# Altium PCB BLDC-2020.PcbDoc (part 1 of 3)
Units mil, origin at the board's own origin, x right, y up, seen from the top; angles counter-clockwise.
Board outline 3000 x 7500 mil, 4 copper layers (Top Layer, GND, Power, Bottom Layer), stack 26.468 mil thick; 202 components, 138 nets, 710 pads, 30 vias.
Unrouted connection lines stored in the file: 399.
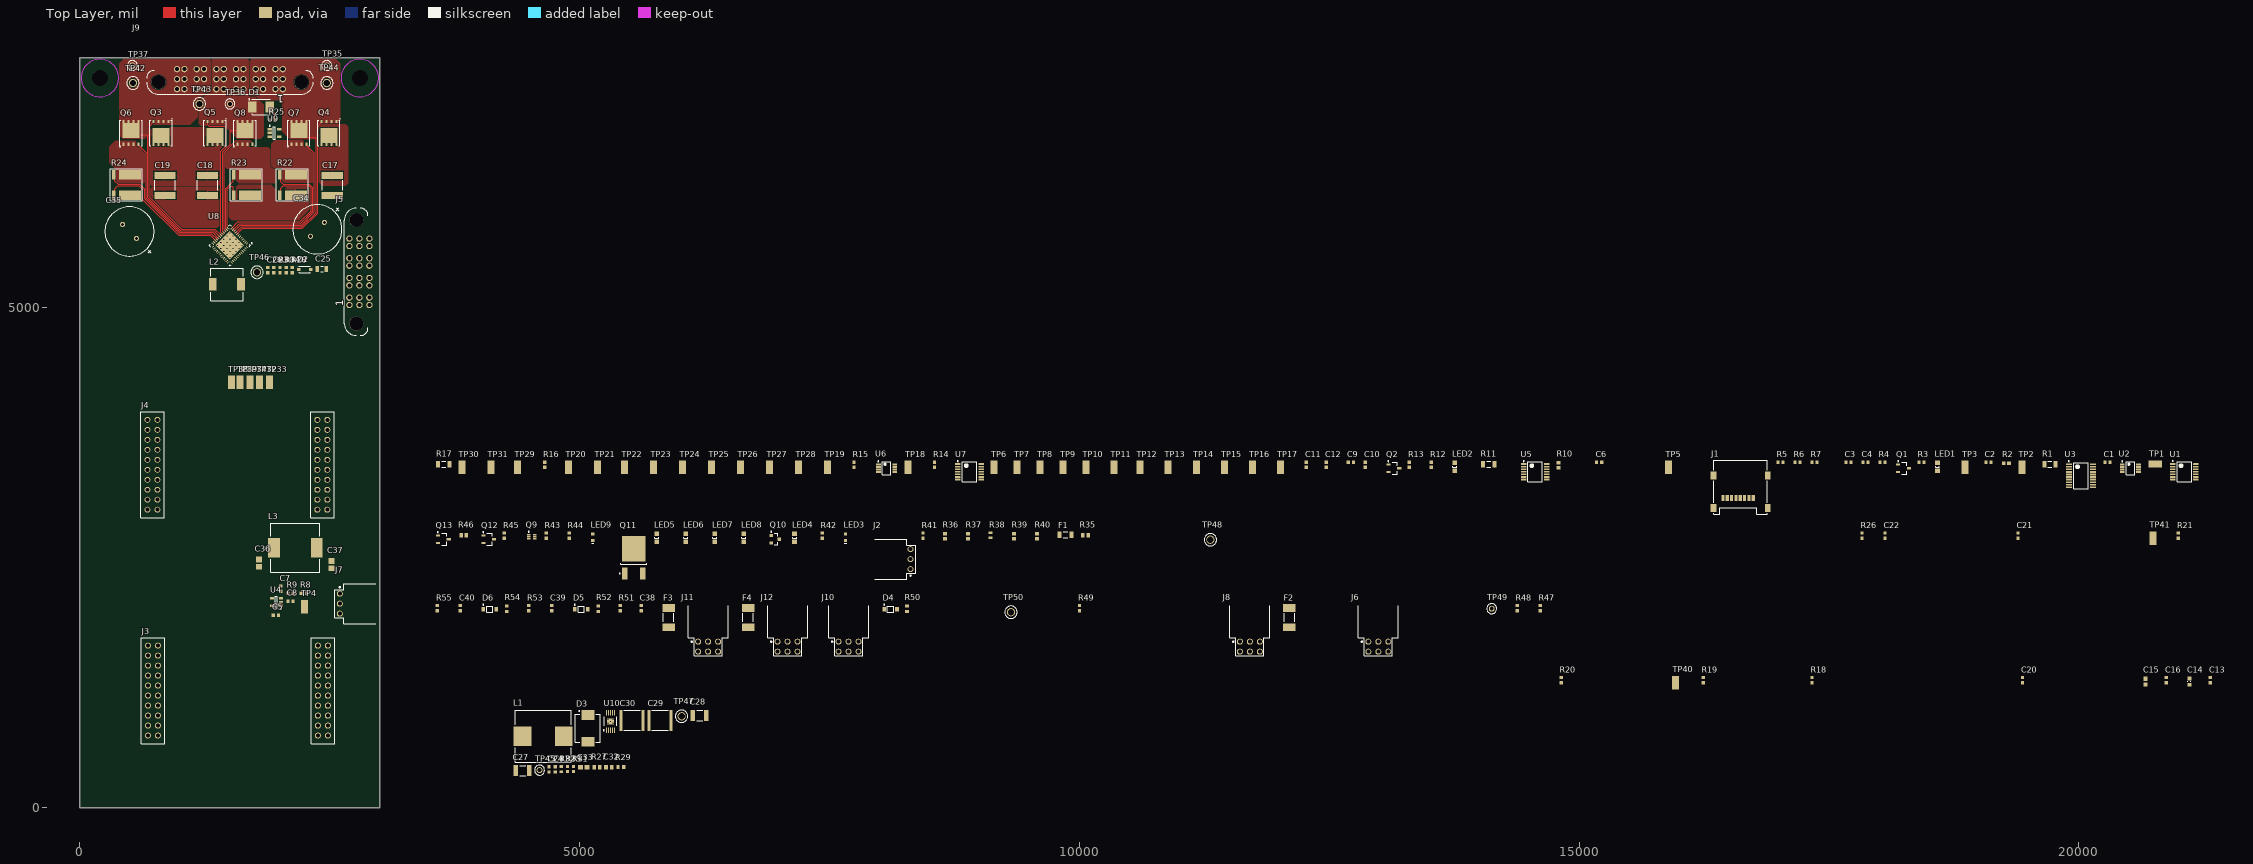
[diagram p0: Top Layer view]
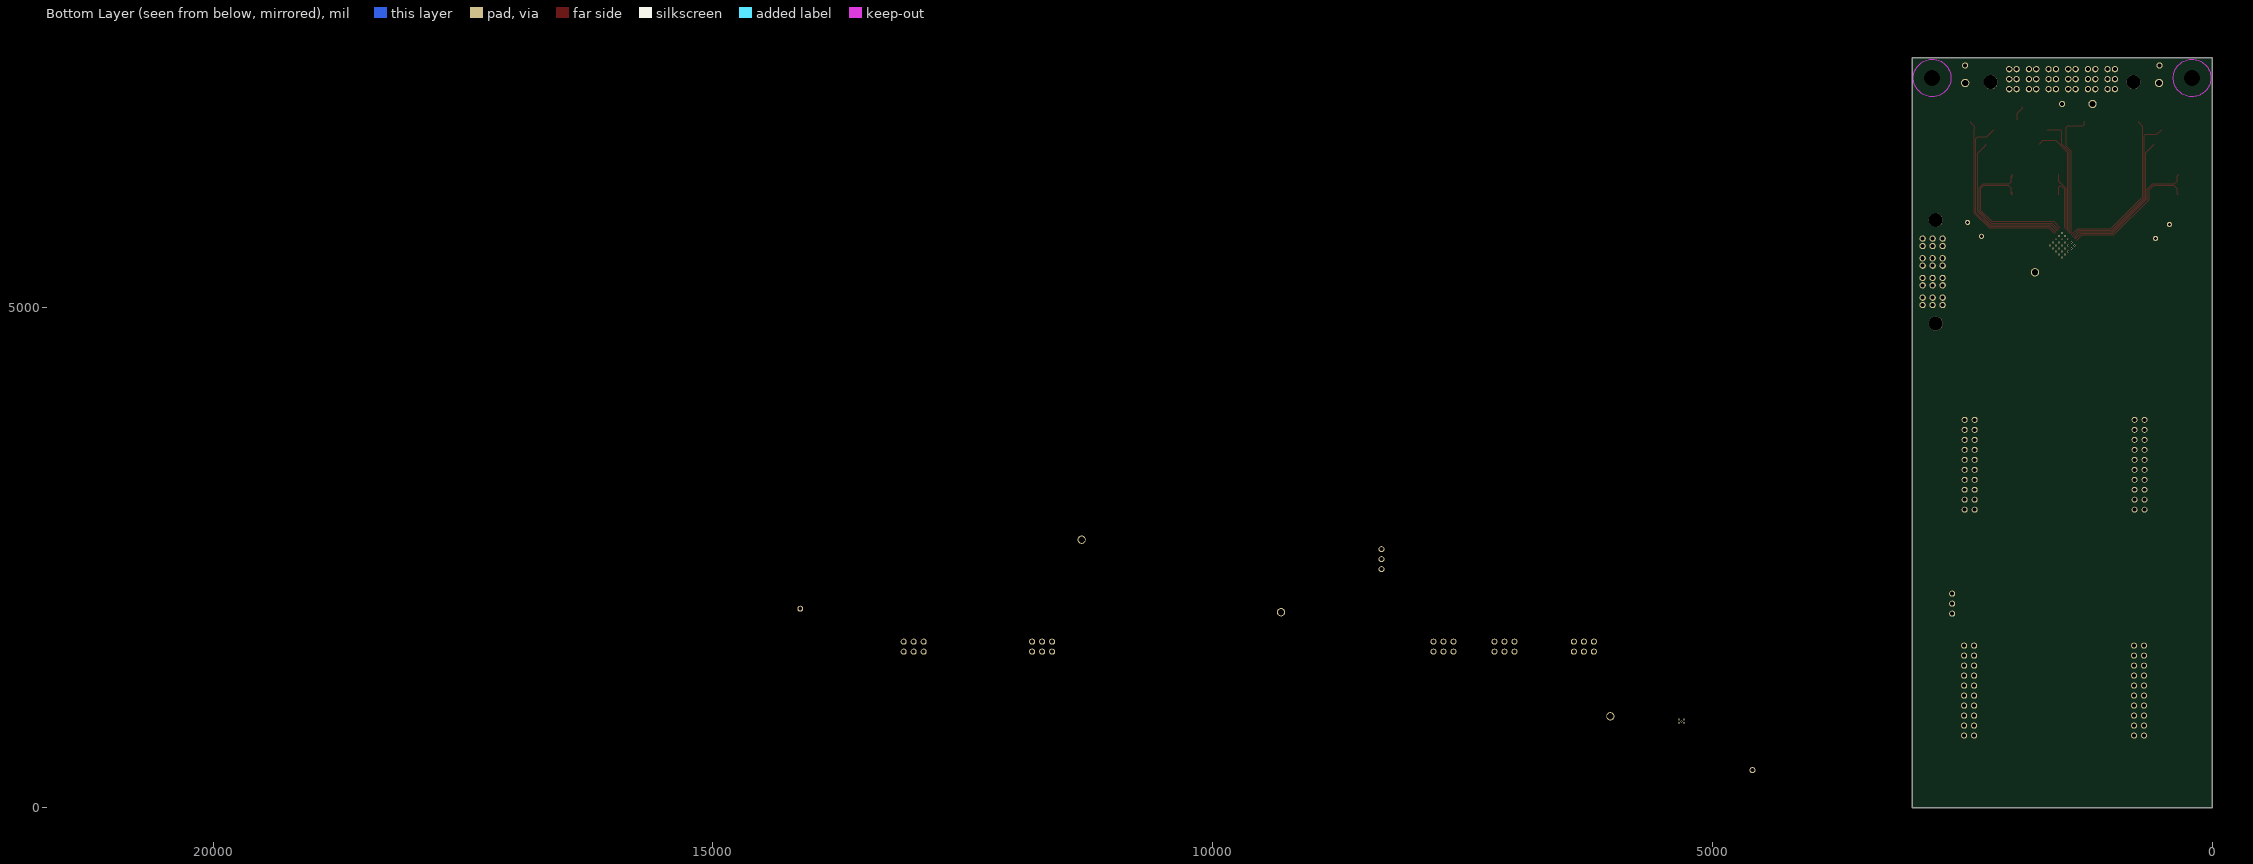
[diagram p1: Bottom Layer view, seen from below]
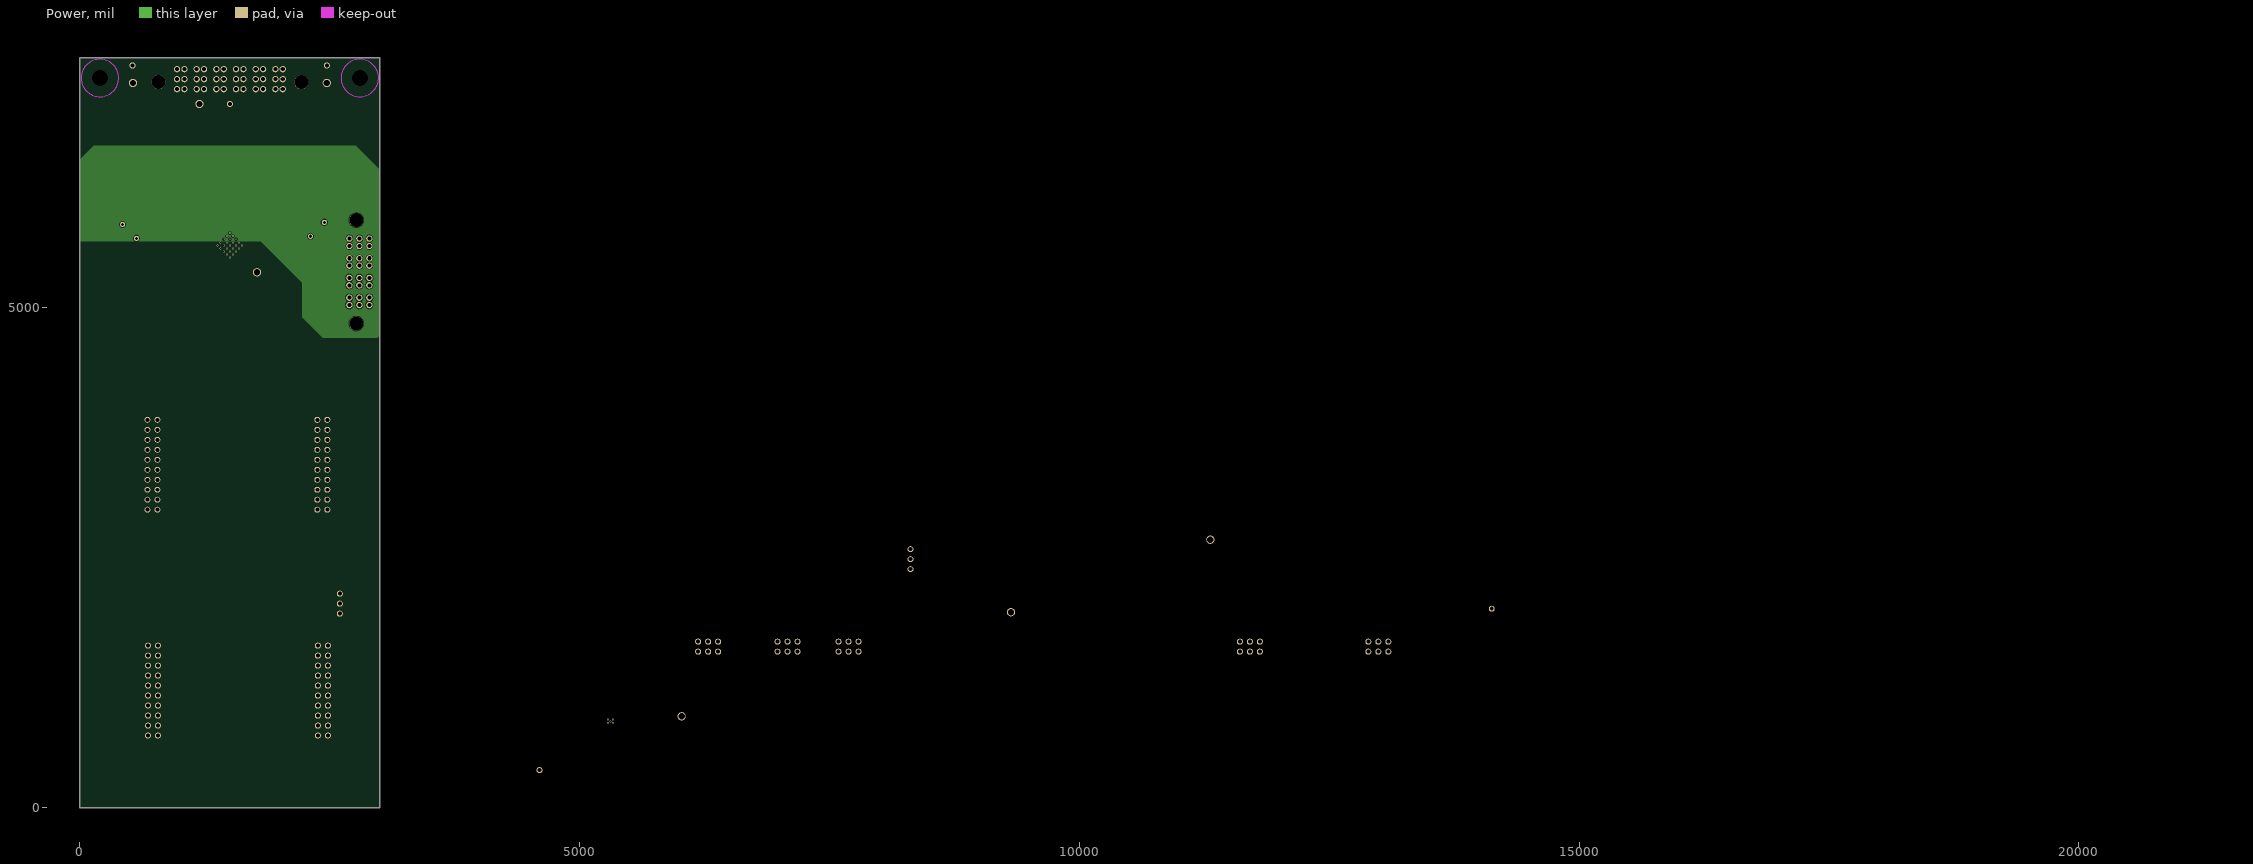
[diagram p2: Power]

## Layer stack, top to bottom
Top Solder: solder mask 0.4, Solder Resist, Dk 3.5
Top Layer: signal copper 2.7559
Dielectric 2: prepreg 2.8, PP-006, Dk 4.1
GND: signal copper 1.3779
Dielectric 1: dielectric 12.6, FR-4, Dk 4.8
Power: signal copper 1.3779
Dielectric 3: prepreg 2.8, PP-006, Dk 4.1
Bottom Layer: signal copper 2.7559
Bottom Solder: solder mask 0.4, Solder Resist, Dk 3.5

## Board outline
0,0 3000,0 3000,7500 0,7500

## Design rules (kind name [scope] priority, off if disabled: settings)
Clearance [All] p1: gap=6 ignorepadtopadclearanceinfootprint=FALSE except(10: Fill-Fill Fill-Poly Fill-Region Poly-Poly Poly-Region Region-Region)
DiffPairsRouting [All] p1: maxlimit=15 minlimit=6 mostfreqgap=10 toplayer_minwidth=6 toplayer_maxwidth=30 toplayer_prefwidth=15 midlayer1_minwidth=6 midlayer1_maxwidth=30 midlayer1_prefwidth=15 midlayer2_minwidth=6 midlayer2_maxwidth=30 midlayer2_prefwidth=15 bottomlayer_minwidth=6 bottomlayer_maxwidth=30 bottomlayer_prefwidth=15 maxuncoupledlength=250
HoleSize [All] p1: absolutevalues=TRUE maxlimit=100 minlimit=11 maxpercent=80.000 minpercent=20.000
PolygonConnect "Phase Connections" [InNetClass('PhaseNet')] p1: connectstyle=Direct reliefconductorwidth=10 reliefentries=4 polygonreliefangle="90 Angle" airgapwidth=10
PolygonConnect PolygonConnect_1 [All] p2: connectstyle=Relief reliefconductorwidth=10 reliefentries=4 polygonreliefangle="90 Angle" airgapwidth=10
RoomDefinition "5V Regulator" [InComponentClass('5V Regulator')] p1: confinementstyle=ConfineIn formatcopy=TRUE lockcomponents=FALSE outline 4325,0 6325,0 6325,1000 4325,1000
RoomDefinition "3.3V Regulator" [InComponentClass('3.3V Regulator')] p2: confinementstyle=ConfineIn formatcopy=TRUE lockcomponents=FALSE outline 495.48,5000 3000,5000 3000,6002.16 495.48,6002.16
RoomDefinition FETBridge [InComponentClass('FETBridge')] p3: confinementstyle=ConfineIn formatcopy=TRUE lockcomponents=FALSE outline 0,6000 3000,6000 3000,7500 0,7500
RoutingTopology [All] p1: topology=Daisy_Balanced
RoutingVias [All] p1: holewidth=28 width=50 viastyle="Through Hole" minholewidth=11 minwidth=23 maxholewidth=50 maxwidth=100
SolderMaskExpansion [All] p1: expansion=4
Width [All] p1: maxlimit=1000 minlimit=6 preferedwidth=10
27 further rules are at their usual default settings.

## Classes and differential pairs
net class PhaseNet: NetQ6_S NetQ7_S NetQ8_S PHASE_A PHASE_B PHASE_C
component class "5V Regulator": C24 C27 C28 C29 C30 C31 C32 C33 D3 L1 R27 R29 R31 R32 R33 TP45 TP47 U10
component class "3.3V Regulator": C23 C25 C26 D2 L2 R28 R30 R34 TP46
component class FETBridge: C17 C18 C19 D1 Q3 Q4 Q5 Q6 Q7 Q8 R22 R23 R24 R25 TP32 TP33 TP34 TP35 TP36 TP37 TP38 TP39 TP42 TP43 TP44
differential pair class SC: SC
differential pair class SB: SB
differential pair class SA: SA
component class "MCU and Digital Interfaces": C1 C2 C3 C4 C5 C6 C7 C8 C9 C10 C11 C12 J1 LED1 LED2 Q1 Q2 R1 R2 R3 R4 R5 R6 R7 R8 R9 R10 R11 R12 R13 R14 R15 R16 R17 TP1 TP2 TP3 TP4 TP5 TP6 TP7 TP8 TP9 TP10 TP11 TP12 TP13 TP14 TP15 TP16 TP17 TP18 TP19 TP20 TP21 TP22 TP23 TP24 TP25 TP26 TP27 TP28 TP29 TP30 TP31 U1 U2 U3 U4 U5 U6 U7
component class "Gate Driver and Power Section": C13 C14 C15 C16 C17 C18 C19 C20 C21 C22 C23 C24 C25 C26 C27 C28 C29 C30 C31 C32 C33 D1 D2 D3 F1 J2 L1 L2 LED3 LED4 LED5 LED6 LED7 LED8 LED9 Q3 Q4 Q5 Q6 Q7 Q8 Q9 Q10 Q11 Q12 Q13 R18 R19 R20 R21 R22 R23 R24 R25 R26 R27 R28 R29 R30 R31 R32 R33 R34 R35 R36 R37 R38 R39 R40 R41 R42 R43 R44 R45 R46 TP32 TP33 TP34 TP35 TP36 TP37 TP38 TP39 TP40 TP41 TP42 TP43 TP44 TP45 TP46 TP47 TP48 U9 U10
component class "Connectors and Inputs": C34 C35 C36 C37 C38 C39 C40 D4 D5 D6 F2 F3 F4 J3 J4 J5 J6 J7 J8 J9 J10 J11 J12 L3 R47 R48 R49 R50 R51 R52 R53 R54 R55 TP49 TP50
differential pair SC: +SC_P -SC_N
differential pair SB: +SB_P -SB_N
differential pair SA: +SA_P -SA_N

## Components (designator, comment, footprint, x,y, rotation, side; value= is the part's Value field where it differs from the comment)
C1 "0.1uF" CAPC1608X05L 20285,3455 r0 top
C2 "0.1uF" CAPC1608X05L 19095,3455 r0 top
C3 "0.1uF" CAPC1608X05L 17695,3455 r0 top
C4 "0.1uF" CAPC1608X05L 17865,3455 r0 top
C5 "0.1uF" CAPC1608X05L 1959.41,1925 r0 top
C6 "0.1uF" CAPC1608X05L 15200,3455 r0 top
C7 "3.9nF" CAPC1608X05L 2010,2190.59 r270 top
C8 "39nF" CAPC1608X05L 2105.59,2065 r180 top
C9 "0.1uF" CAPC1608X05L 12715,3455 r0 top
C10 "0.1uF" CAPC1608X05L 12860,3430 r90 top
C11 "0.1uF" CAPC1608X05L 12270,3430 r90 top
C12 "0.1uF" CAPC1608X05L 12470,3430 r90 top
C13 "1uF" CAPC1608X05L 21315,1275 r90 top
C14 "47nF" CAPC0603(1608)100_N 21105,1260 r90 top
C15 "10uF" CAPC1608X90X35NL15T15 20665,1260 r90 top
C16 "0.1uF" CAPC1608X05L 20875,1275 r90 top
C17 "10uF" CAPC5750X279X64NL40T39 2525,6225 r90 top
C18 "10uF" CAPC5750X279X64NL40T39 1275,6225 r90 top
C19 "10uF" CAPC5750X279X64NL40T39 850,6225 r90 top
C20 "1uF" CAPC1608X05L 19435,1275 r90 top
C21 "0.1uF" CAPC1608X05L 19390,2720 r90 top
C22 "0.1uF" CAPC1608X05L 18060,2720 r90 top
C23 "0.1uF" CAPC1608X05L 1940.27,5376.82 r90 top
C24 "0.1uF" CAPC1608X05L 4692.71,383.17 r90 top
C25 "4.7uF" CAPC2113X15N 2419.84,5388.63 r0 top
C26 "10uF" CAPC1608X05L 1878.8,5376.82 r90 top
C27 "100uF" MURA-1210_H_2.7_M 4429.55,369.39 r0 top
C28 "100uF" MURA-1210_H_2.7_M 6200.32,920.88 r0 top
C29 "10uF" TDK-C5750-2_L 5803.11,871.67 r0 top
C30 "10uF" TDK-C5750-2_L 5523.14,871.67 r0 top
C31 "0.1uF" CAPC1608X05L 4754.17,383.17 r90 top
C32 "4700pf" CAPC1608X90X35ML10T15 5291.27,403.83 r0 top
C33 "270pf" CAPC1608X90X35ML15T15 5041.37,402.85 r0 top
C34 "390uF" EGPD800ELL391MK25H 2445,5855 r225 top
C35 "390uF" EGPD800ELL391MK25H 565,5695 r135 top
C36 "22uF" CAPC2013X145X50ML20T25 1790,2445 r90 top
C37 "22uF" CAPC2013X145X50ML20T25 2515,2430 r90 top
C38 "47nF" CAPC1608X05L 5615,1995 r90 top
C39 "47nF" CAPC1608X05L 4720,1995 r90 top
C40 "47nF" CAPC1608X05L 3805,1995 r90 top
D1 "1SMB5936BT3G" ONSC-SMB-2-403A-03_H_V 1812.01,7010 r0 top
D2 "PMEG6010CEH,115" SODFL350X120-2N 2249.12,5384.76 r0 top
D3 "B3100-13-F" DIOD-SMC-2_V 5081.5,792.93 r90 top
D4 "MMSZ5226BT1G" ONSC-SOD-123-2-425-04_V 8110,1985 r0 top
D5 "MMSZ5226BT1G" ONSC-SOD-123-2-425-04_V 5015,1985 r0 top
D6 "MMSZ5226BT1G" ONSC-SOD-123-2-425-04_V 4100,1985 r0 top
F1 "1.5A" TECO-NANOSMDC150F-2_V 9860,2730 r0 top
F2 "0451.500MRL" LFUS-45X_V 12100,1900 r90 top
F3 "0451.500MRL" LFUS-45X_V 5890,1900 r90 top
F4 "0451.500MRL" LFUS-45X_V 6685,1900 r90 top
J1 "693072010801" 693072010801 16615,3205 r0 top
J2 "IPL1-103-01-L-S-RA-K" IPL1-103-01-XXX-S-RA 7930,2485 r90 top
J3 "LuanchPad 40 Pin" "TI LuanchPad" 1580,1170 r180 top
J4 "LuanchPad 40 Pin" "TI LuanchPad" 1575,3430 r180 top
J5 "MPT-04-01-01-L-RA-SD" *MPT-04-01-XX-X-RA-SD 3007.2,5360.43 r90 top
J6 "IPL1-103-01-XXX-D-RA" IPL1-103-01-XXX-D-RA 12990,2040 r0 top
J7 "IPL1-103-01-L-S-RA-K" IPL1-103-01-XXX-S-RA 2980,2040 r270 top
J8 "IPL1-103-01-XXX-D-RA" IPL1-103-01-XXX-D-RA 11705,2040 r0 top
J9 "MPT-06-01-01-L-RA-SD" *MPT-06-01-XX-X-RA-SD 1500,7500 r180 top locked
J10 "IPL1-103-01-XXX-D-RA" IPL1-103-01-XXX-D-RA 7690,2040 r0 top
J11 "IPL1-103-01-XXX-D-RA" IPL1-103-01-XXX-D-RA 6285,2040 r0 top
J12 "IPL1-103-01-XXX-D-RA" IPL1-103-01-XXX-D-RA 7080,2040 r0 top
L1 "22uH" WE-HCI-1365 4634.28,714.25 r0 top
L2 "33uH" INDP8080X46L 1470,5235 r0 top
L3 "120uH" INDP125125X60N 2155,2600 r0 top
LED1 "150080GS75000" 0805_A 18585,3410 r90 top
LED2 "150080GS75000" 0805_A 13755,3410 r90 top
LED3 "150060VS75000" 0603_A 7660,2705 r90 top
LED4 "150080GS75000" 0805_A 7150,2700 r90 top
LED5 "150080GS75000" 0805_A 5770,2700 r90 top
LED6 "150080GS75000" 0805_A 6060,2700 r90 top
LED7 "150080GS75000" 0805_A 6350,2700 r90 top
LED8 "150080GS75000" 0805_A 6640,2700 r90 top
LED9 "150060VS75000" 0603_A 5130,2705 r90 top
Q1 "DMN1019USN-7" SOT95P285X140-3N 18245,3395 r0 top
Q2 "DMN1019USN-7" SOT95P285X140-3N 13145,3395 r0 top
Q3 "BSC027N06LS5ATMA1" PG-TDSON-8-7 810,6750 r270 top
Q4 "BSC027N06LS5ATMA1" PG-TDSON-8-7 2490,6750 r270 top
Q5 "BSC027N06LS5ATMA1" PG-TDSON-8-7 1350,6750 r270 top
Q6 "BSC027N06LS5ATMA1" PG-TDSON-8-7 510,6750 r90 top
Q7 "BSC027N06LS5ATMA1" PG-TDSON-8-7 2190,6750 r90 top
Q8 "BSC027N06LS5ATMA1" PG-TDSON-8-7 1650,6750 r90 top
Q9 "NX3008CBKV,115" NXP-SOT666_M 4520,2710 r0 top
Q10 "NTR4101PT1G" ONSC-SOT-23-3-318-08_V 6955,2685 r0 top
Q11 "FQD9N25TM_F080" DPAK229P991X239-3N 5540,2460 r90 top
Q12 "DMN1019USN-7" SOT95P285X140-3N 4090,2685 r0 top
Q13 "DMN1019USN-7" SOT95P285X140-3N 3635,2685 r0 top
R1 "0" RESC3116X65X40NL10T20 19710,3435 r0 top
R2 "91" RESC1608X50X30NL20T20 19275,3445 r0 top
R3 "100" CAPC1608X05L 18425,3455 r0 top
R4 "10k" CAPC1608X05L 18035,3455 r0 top
R5 "10k" CAPC1608X05L 17015,3455 r0 top
R6 "100k" CAPC1608X05L 17185,3455 r0 top
R7 "100k" CAPC1608X05L 17355,3455 r0 top
R8 "19.1K" CAPC1608X05L 2240,2145 r180 top
R9 "536k" CAPC1608X05L 2105,2145 r180 top
R10 "91" RESC1608X50X30NL20T20 14795,3425 r90 top
R11 "0" RESC3116X65X40NL10T20 14095,3435 r0 top
R12 "10k" CAPC1608X05L 13520,3430 r90 top
R13 "100" CAPC1608X05L 13300,3430 r90 top
R14 "10k" CAPC1608X05L 8550,3430 r90 top
R15 "10k" CAPC1608X05L 7745,3430 r90 top
R16 "10k" CAPC1608X05L 4650,3430 r90 top
R17 "0" RESC3116X65X40NL10T20 3640,3435 r0 top
R18 "10k" CAPC1608X05L 17330,1275 r90 top
R19 "10k" CAPC1608X05L 16240,1275 r90 top
R20 "10k" CAPC1608X05L 14820,1275 r90 top
R21 "10k" CAPC1608X05L 20995,2720 r90 top
R22 "2m" WSL27262L000FEB 2160,6230 r180 top
R23 "2m" WSL27262L000FEB 1700,6230 r180 top
R24 "2m" WSL27262L000FEB 500,6230 r180 top
R25 "470" CAPC1608X05L 1925,6880 r180 top
R26 "10k" CAPC1608X05L 17830,2720 r90 top
R27 "53.6k" RESC1609X50X30ML10T20 5171.73,403.83 r0 top
R28 "100k" CAPC1608X05L 2124.66,5376.82 r90 top
R29 "10K" RESC1608X55X25ML10T15 5411.79,404.82 r0 top
R30 "28k" CAPC1608X05L 2001.73,5376.82 r90 top
R31 "412k" RESC1608X55X30LL15T15 4938.57,386.12 r90 top
R32 "10k" RESC1609X55X30LL15T15 4815.64,384.15 r90 top
R33 "12.7k" RESC1608X55X30LL15T15 4877.1,386.12 r90 top
R34 "8.45k" CAPC1608X05L 2063.2,5376.82 r90 top
R35 "41" RESC1609X50X30ML10T20 10060,2725 r0 top
R36 "91" RESC1608X50X30NL20T20 8655,2715 r90 top
R37 "91" RESC1608X50X30NL20T20 8885,2715 r90 top
R38 "430" RESC1608X55X30LL20T10 9110,2725 r90 top
R39 "91" RESC1608X50X30NL20T20 9345,2715 r90 top
R40 "91" RESC1608X50X30NL20T20 9575,2715 r90 top
R41 "100" CAPC1608X05L 8435,2720 r90 top
R42 "10k" CAPC1608X05L 7425,2720 r90 top
R43 "100" CAPC1608X05L 4665,2720 r90 top
R44 "100" CAPC1608X05L 4895,2720 r90 top
R45 "100" CAPC1608X05L 4245,2720 r90 top
R46 "41" RESC1609X50X30ML10T20 3840,2725 r0 top
R47 "10k" CAPC1608X05L 14610,1995 r90 top
R48 "10k" CAPC1608X05L 14380,1995 r90 top
R49 "28k" CAPC1608X05L 10000,1995 r90 top
R50 "97.6k" RESC1608X55X30NL15T15 8275,1990 r90 top
R51 "4.99K" CAPC1608X05L 5405,1995 r90 top
R52 "97.6k" RESC1608X55X30NL15T15 5185,1990 r90 top
R53 "4.99K" CAPC1608X05L 4490,1995 r90 top
R54 "97.6k" RESC1608X55X30NL15T15 4270,1990 r90 top
R55 "4.99K" CAPC1608X05L 3575,1995 r90 top
TP1 "5015" KSTN-5015_V 20765,3440 r0 top
TP2 "5015" KSTN-5015_V 19430,3405 r90 top
TP3 "5015" KSTN-5015_V 18860,3405 r90 top
TP4 "5015" KSTN-5015_V 2245,2010 r270 top
TP5 "5015" KSTN-5015_V 15895,3405 r90 top
TP6 "5015" KSTN-5015_V 9145,3405 r90 top
TP7 "5015" KSTN-5015_V 9375,3405 r90 top
TP8 "5015" KSTN-5015_V 9605,3405 r90 top
TP9 "5015" KSTN-5015_V 9835,3405 r90 top
TP10 "5015" KSTN-5015_V 10065,3405 r90 top
TP11 "5015" KSTN-5015_V 10345,3405 r90 top
TP12 "5015" KSTN-5015_V 10605,3405 r90 top
TP13 "5015" KSTN-5015_V 10885,3405 r90 top
TP14 "5015" KSTN-5015_V 11170,3405 r90 top
TP15 "5015" KSTN-5015_V 11450,3405 r90 top
TP16 "5015" KSTN-5015_V 11730,3405 r90 top
TP17 "5015" KSTN-5015_V 12010,3405 r90 top
TP18 "5015" KSTN-5015_V 8285,3405 r90 top
TP19 "5015" KSTN-5015_V 7480,3405 r90 top
TP20 "5015" KSTN-5015_V 4890,3405 r90 top
TP21 "5015" KSTN-5015_V 5180,3405 r90 top
TP22 "5015" KSTN-5015_V 5450,3405 r90 top
TP23 "5015" KSTN-5015_V 5740,3405 r90 top
TP24 "5015" KSTN-5015_V 6030,3405 r90 top
TP25 "5015" KSTN-5015_V 6320,3405 r90 top
TP26 "5015" KSTN-5015_V 6610,3405 r90 top
TP27 "5015" KSTN-5015_V 6900,3405 r90 top
TP28 "5015" KSTN-5015_V 7190,3405 r90 top
TP29 "5015" KSTN-5015_V 4380,3405 r90 top
TP30 "5015" KSTN-5015_V 3820,3405 r90 top
TP31 "5015" KSTN-5015_V 4110,3405 r90 top
TP32 "5015" KSTN-5015_V 1798.35,4254.54 r90 top
TP33 "5015" KSTN-5015_V 1896.42,4254.54 r90 top
TP34 "5015" KSTN-5015_V 1700.27,4254.54 r90 top
TP35 "5002" KSTN-5002 2470,7425 r90 top
TP36 "5002" KSTN-5002 1500,7040 r90 top
TP37 "5002" KSTN-5002 525,7425 r90 top
TP38 "5015" KSTN-5015_V 1515,4255 r90 top
TP39 "5015" KSTN-5015_V 1602.19,4254.54 r90 top
TP40 "5015" KSTN-5015_V 15965,1250 r90 top
TP41 "5015" KSTN-5015_V 20740,2695 r90 top
TP42 "5011" KSTN-5011_V 530,7250 r0 top
TP43 "5011" KSTN-5011_V 1195,7040 r0 top
TP44 "5011" KSTN-5011_V 2470,7250 r0 top
TP45 "5004" KSTN-5004 4598.04,374.57 r90 top
TP46 "5013" KSTN-5013_V 1771.73,5355.82 r0 top
TP47 "5011" KSTN-5011_V 6019.43,913.66 r0 top
TP48 "5011" KSTN-5011_V 11310,2680 r0 top
TP49 "5003" KSTN-5003 14125,1990 r90 top
TP50 "5011" KSTN-5011_V 9315,1955 r0 top
U1 "SN74LV4T125PWR" PW0014A_N 21055,3360 r0 top
U2 "SN74LVC3G17DCTR" DCT0008A_M 20515,3395 r0 top
U3 "TXS0108EPWR" PW0020A_M 20020,3320 r0 top
U4 "LTC6240CS5" LT-S5-5-TSOT-23_L 1965.28,2057.4 r180 top
U5 "TXB0104PWR" PW0014A_N 14560,3360 r0 top
U6 "SN74LVC3G17DCTR" DCT0008A_M 8070,3395 r0 top
U7 "SN74LV4T125PWR" PW0014A_N 8900,3360 r0 top
U8 "DRV8323RSRGZR" QFN50P700X700X100_HS-49N 1500,5625 r225 top
U9 "TC77-5.0MCTTR" SOT-23-CT5_N 1945,6750 r0 top
U10 "TPS54260DGQR" DGQ0010D_N 5308.2,861.83 r90 top

## Footprints (in the part's own frame and the unit in brackets; to place one, negate y for a bottom-side part, rotate by r counter-clockwise, add the part's x,y. Pads: shape width x height; smd on the part's side, far side on the other; paste and mask are expansions set on the pad)
0603_A [mm] "Chip LED, 2-Leads, Body 1.6x0.8mm, IPC Medium Density"
  rect 0.8x0.8 smd: 1(-0.8,0) 2(0.8,0)
  silkscreen extent -1.5,-0.3 -1.5,0.3, body extent -0.8,-0.4 0.8,0.4, height 0.7
0805_A [mm] "Chip LED, 2-Leads, Body 2.0x1.3mm, IPC Medium Density"
  rect 1.1x1.2 smd: 1(-1.05,0) 2(1.05,0)
  silkscreen extent -0.15,-0.5 0.15,0.5, body extent -1,-0.62 1,0.63, height 0.68
693072010801 [mm] "Micro SD Card Connector Hinge - 8 Pins"
  rect 0.8x1.5 smd: 1(3.2,-2.7) 2(2.1,-2.7) 3(1,-2.7) 4(-0.1,-2.7) 5(-1.2,-2.7) 6(-2.3,-2.7) 7(-3.4,-2.7) 8(-4.5,-2.7)
  rect 1.45x2 smd: Shield(-6.875,-5.3) Shield(-6.875,3) Shield(6.875,-5.3) Shield(6.875,3)
  silkscreen extent -6.8,-6.85 6.8,6.85, body extent -7.25,-6.85 7.25,6.85, height 1.79
*MPT-04-01-XX-X-RA-SD [mm]
  round 3.56 hole 3.56 unplated: None(-13.14,6.15) None(13.14,6.15)
  round 1.6 hole 1.04: P1-1(-8.44,7.93) P1-2(-8.44,5.39) P1-3(-8.44,2.85) P1-4(-6.56,7.93) P1-5(-6.56,5.39) P1-6(-6.56,2.85) P2-1(-3.44,7.93) P2-2(-3.44,5.39) P2-3(-3.44,2.85) P2-4(-1.56,7.93) P2-5(-1.56,5.39) P2-6(-1.56,2.85) P3-1(1.56,7.93) P3-2(1.56,5.39) P3-3(1.56,2.85) P3-4(3.44,7.93) P3-5(3.44,5.39) P3-6(3.44,2.85) P4-1(6.56,7.93) P4-2(6.56,5.39) P4-3(6.56,2.85) P4-4(8.44,7.93) P4-5(8.44,5.39) P4-6(8.44,2.85)
  silkscreen extent -16.18,3.19 16.18,9.19, body extent -15.62,-6.01 15.74,8.8, height 10.75
*MPT-06-01-XX-X-RA-SD [mm]
  round 1.6 hole 1.04: 1(-13.44,7.93) 2(-13.44,5.39) 3(-13.44,2.85) 4(-11.56,7.93) 5(-11.56,5.39) 6(-11.56,2.85) 7(-8.44,7.93) 8(-8.44,5.39) 9(-8.44,2.85) 10(-6.56,7.93) 11(-6.56,5.39) 12(-6.56,2.85) 13(-3.44,7.93) 14(-3.44,5.39) 15(-3.44,2.85) 16(-1.56,7.93) 17(-1.56,5.39) 18(-1.56,2.85) 19(1.56,7.93) 20(1.56,5.39) 21(1.56,2.85) 22(3.44,7.93) 23(3.44,5.39) 24(3.44,2.85) 25(6.56,7.93) 26(6.56,5.39) 27(6.56,2.85) 28(8.44,7.93) 29(8.44,5.39) 30(8.44,2.85) 31(11.56,7.93) 32(11.56,5.39) 33(11.56,2.85) 34(13.44,7.93) 35(13.44,5.39) 36(13.44,2.85)
  round 3.56 hole 3.56 unplated: None(-18.14,6.15) None(18.14,6.15)
  silkscreen extent -21.18,3.19 21.18,9.19, body extent -20.7,-6.05 20.66,8.76, height 10.85
CAPC0603(1608)100_N [mm] "Chip Capacitor, Body 1.6x0.8mm, Height 1.0mm, IPC Medium Density"
  rect 0.9x1 smd: 1(-0.8,0) 2(0.8,0)
  silkscreen extent -0.05,-0.4 0.05,0.4, body extent -0.87,-0.48 0.88,0.47, height 1
CAPC1608X05L [mm] "Chip Capacitor, 2-Leads, Body 1.60x0.80mm, IPC High Density"
  rect 0.8x0.85 smd: 1(-0.65,0) 2(0.65,0)
  body extent -0.85,-0.45 0.85,0.45, height 0.5
CAPC1608X90X35ML10T15 [mm] "Chip Capacitor, 2-Leads, Body 1.60x0.80mm, IPC Low Density"
  rect 0.95x1.05 smd: 1(-0.725,0) 2(0.725,0)
  body extent -0.85,-0.45 0.85,0.45, height 0.9
CAPC1608X90X35ML15T15 [mm] "Chip Capacitor, 2-Leads, Body 1.60x0.81mm, IPC Low Density"
  rect 1.25x1.1 smd: 1(-0.85,0) 2(0.85,0)
  body extent -0.88,-0.48 0.87,0.48, height 0.9
CAPC1608X90X35NL15T15 [mm] "Chip Capacitor, 2-Leads, Body 1.60x0.81mm, IPC Medium Density"
  rect 1.05x1 smd: 1(-0.75,0) 2(0.75,0)
  body extent -0.88,-0.48 0.87,0.48, height 0.9
CAPC2013X145X50ML20T25 [mm] "Chip Capacitor, 2-Leads, Body 2.00x1.25mm, IPC Low Density"
  rect 1.5x1.55 smd: 1(-0.9,0) 2(0.9,0)
  body extent -1.1,-0.72 1.1,0.72, height 1.45
CAPC2113X15N [mm] "Chip Capacitor, 2-Leads, Body 2.13x1.27mm, IPC Medium Density"
  rect 0.9x1.5 smd: 1(-1.15,0) 2(1.15,0)
  silkscreen extent -0.3,-0.65 0.3,0.65, body extent -1.22,-0.75 1.22,0.75, height 1.5
CAPC5750X279X64NL40T39 [mm] "Chip Capacitor, 2-Leads, Body 6.1x5.4mm, IPC Medium Density"
  rect 1.8x5.4 smd: 1(-2.525,0) 2(2.525,0)
  silkscreen extent -1.25,-2.6 1.25,2.6, body extent -3.05,-2.7 3.05,2.7, height 2.79
DCT0008A_M [mm] "SOP, 8-Leads, Body 2.9x3.2mm, Pitch 0.65mm, IPC Low Density"
  rrect22% 1.25x0.45 smd: 1(-2.075,0.975) 2(-2.075,0.325) 3(-2.075,-0.325) 4(-2.075,-0.975) 5(2.075,-0.975) 6(2.075,-0.325) 7(2.075,0.325) 8(2.075,0.975)
  silkscreen extent -2.2,-1.6 1.05,1.87, body extent -2.01,-1.47 2.01,1.48, height 1.3
DGQ0010D_N [mm] "TSOP, 10-Leads, Body 3.1x3.1mm, Pitch 0.5mm, Thermal Pad 1.88x1.57mm, IPC Medium Density"
  rrect33% 1.35x0.3 smd: 1(-2.225,1) 2(-2.225,0.5) 3(-2.225,0) 4(-2.225,-0.5) 5(-2.225,-1) 6(2.225,-1) 7(2.225,-0.5) 8(2.225,0) 9(2.225,0.5) 10(2.225,1)
  rrect6% 1.57x1.88 smd: 11(0,0)
  silkscreen extent -2.35,-1.55 1.15,1.87, body extent -2.45,-1.5 2.45,1.5, height 0.94
DIOD-SMC-2_V [mm] "Molded Diode, 2-Leads, Body 7.11x6.22mm"
  rect 2.5x3.3 smd: 1(-3.4,0) 2(3.4,0)
  silkscreen extent -3.6,-3.15 4.52,3.15, body extent -3.77,-3.11 3.77,3.11, height 2.5
DPAK229P991X239-3N [mm] "D-PAK, 3-Pads, Body 6.21x6.73mm (max), IPC Medium Density"
  rect 3x1.4 smd: 1(-3,2.29) 3(-3,-2.29)
  rect 6.5x6 smd: 4(3.25,0)
  silkscreen extent -3.12,-3.35 -0.4,3.66, body extent -2.44,-3.37 7.46,3.37, height 2.39
EGPD800ELL391MK25H [mm]
  round 1.3 hole 0.8: 1(0,0) 2(5,0)
  silkscreen extent -5.22,-6.25 8.75,6.25
INDP8080X46L [mm] "Precision Wire Wound Inductor, 2-Leads, Body 8.00x8.00mm, IPC High Density"
  rect 2x3.2 smd: 1(-3.6,0) 2(3.6,0)
  silkscreen extent -4.15,-4.15 4.15,4.15, body extent -4.1,-4 4.1,4, height 4.7
INDP125125X60N [mm] "Precision Wire Wound Inductor, 2-Leads, Body 12.50x12.50mm, IPC Medium Density"
  rect 2.95x5 smd: 1(-5.425,0) 2(5.425,0)
  silkscreen extent -6.25,-6.25 6.25,6.25, body extent -6.35,-6.25 6.35,6.25, height 6.1
IPL1-103-01-XXX-D-RA [mil]
  round 60 hole 40 mask+3: 1(-100,-380) 2(0,-380) 3(100,-380) 4(-100,-480) 5(0,-480) 6(100,-480)
  silkscreen extent -200,-520 200,-20, body extent -177,-492 183,0, height 310
IPL1-103-01-XXX-S-RA [mil]
  round 60 hole 40 mask+3: 1(-100,-380) 2(0,-380) 3(100,-380)
  silkscreen extent -200,-430 200,-20, body extent -180,-397 180,-5, height 260
KSTN-5002 [mm] "Test Point, Through Hole, Dia 2.54mm"
  round 1.55 hole 1.016: 1(0,0)
  silkscreen extent -1.27,-1.27 1.27,1.27, body extent -1.25,-1.25 1.25,1.25, height 4.62
KSTN-5003 [mm] "Test Point, Through Hole, Dia 2.54mm"
  round 1.5 hole 1: 1(0,0)
  silkscreen extent -1.27,-1.27 1.27,1.27, body extent -1.27,-1.27 1.27,1.27, height 4.57
KSTN-5004 [mm] "Test Point, Through Hole, Dia 2.54mm"
  round 1.55 hole 1.016: 1(0,0)
  silkscreen extent -1.27,-1.27 1.27,1.27, body extent -1.27,-1.27 1.27,1.27, height 4.57
KSTN-5011_V [mm] "Test Point, Dia 3.17mm"
  round 2.1 hole 1.6: 1(0,0)
  silkscreen extent -1.59,-1.58 1.59,1.58, body extent -1.59,-1.59 1.59,1.59, height 8.13
KSTN-5013_V [mm] "Test Point, Dia 3.17mm"
  round 2.1 hole 1.6: 1(0,0)
  silkscreen extent -1.59,-1.58 1.59,1.58, body extent -1.59,-1.59 1.59,1.59, height 8.13
KSTN-5015_V [mm] "SMD, Body 2.63x1.02mm"
  rect 3.43x1.78 smd: 1(0,0)
  body extent -1.53,-0.51 1.53,0.49, height 1.49
LFUS-45X_V [mm] "SMD, 2-Leads, Body 6.1x2.69mm"
  rect 1.96x3.15 smd: 1(-2.455,0) 2(2.455,0)
  silkscreen extent -1.07,-1.34 1.07,1.34, body extent -3.05,-1.34 3.05,1.34, height 2.94
LT-S5-5-TSOT-23_L [mm] "SOT23, 5-Leads, Body 2.90x1.63mm, Pitch 0.95mm, IPC High Density"
  rect 1x0.55 smd: 1(-1.15,0.95) 2(-1.15,0) 3(-1.15,-0.95) 4(1.15,-0.95) 5(1.15,0.95)
  silkscreen extent -1.28,-1.45 0.25,1.9, body extent -0.87,-1.45 0.87,1.45, height 1
MURA-1210_H_2.7_M [mm] "Chip Capacitor, 2-Leads, Body 3.5x2.7mm, IPC Low Density"
  rect 1.15x2.8 smd: 1(-1.725,0) 2(1.725,0)
  silkscreen extent -0.75,-1.3 0.75,1.3, body extent -1.75,-1.35 1.75,1.35, height 2.7
NXP-SOT666_M [mm] "SOT23, 6-Leads, Body 1.7x1.3mm, Pitch 0.5mm, IPC Low Density"
  rect 0.9x0.3 smd: 1(-0.775,0.5) 2(-0.775,0) 3(-0.775,-0.5) 4(0.775,-0.5) 5(0.775,0) 6(0.775,0.5)
  silkscreen extent -0.9,1.13 -0.65,1.37, body extent -0.65,-0.85 0.65,0.85, height 0.6
ONSC-SMB-2-403A-03_H_V [mil] "Molded, 2-Leads, Body 4.6x3.95mm"
  rect 85x107.99 smd: 1(-87.01,0) 2(87.01,0)
  silkscreen extent -125,-79 91,81, body extent -91,-78 91,78, height 95
ONSC-SOD-123-2-425-04_V [mm] "SOD, 2-Leads, Body 2.69x1.6mm"
  rect 0.91x1.22 smd: 1(-1.635,0) 2(1.635,0)
  silkscreen extent -1.76,-0.8 0.78,1.28, body extent -1.35,-0.8 1.35,0.8, height 1.35
ONSC-SOT-23-3-318-08_V [mm] "SOT23, 3-Leads, Body 2.92x1.3mm, Pitch 0.95mm"
  rect 0.9x0.8 smd: 1(-1,0.95) 2(-1,-0.95) 3(1,0)
  silkscreen extent -1.12,-1.46 0.65,2.02, body extent -0.65,-1.46 0.65,1.46, height 1.11
PG-TDSON-8-7 [mm]
  rect 3.75x4.315 smd paste+0: D(0.65,0)
  rect 0.8x0.5 smd: D(2.9,1.905) D(2.9,-0.635) D(2.9,0.635) D(2.9,-1.905)
  rect 0.85x0.5 smd: G(-2.9,-1.905) S(-2.9,1.905) S(-2.9,-0.635) S(-2.9,0.635)
  silkscreen extent -3.65,-2.82 3.2,2.88, body extent -3.1,-2.68 3.1,2.68, height 1.1
PW0014A_N [mm] "SOP, 14-Leads, Body 5.1x4.5mm, Pitch 0.65mm, IPC Medium Density"
  rrect22% 1.4x0.45 smd: 1(-2.95,1.95) 2(-2.95,1.3) 3(-2.95,0.65) 4(-2.95,0) 5(-2.95,-0.65) 6(-2.95,-1.3) 7(-2.95,-1.95) 8(2.95,-1.95) 9(2.95,-1.3) 10(2.95,-0.65) 11(2.95,0) 12(2.95,0.65) 13(2.95,1.3) 14(2.95,1.95)
  silkscreen extent -3.07,-2.55 1.85,2.85, body extent -3.21,-2.5 3.21,2.5, height 1
PW0020A_M [mm] "SOP, 20-Leads, Body 6.6x4.5mm, Pitch 0.65mm, IPC Low Density"
  rrect22% 1.6x0.45 smd: 1(-3.05,2.925) 2(-3.05,2.275) 3(-3.05,1.625) 4(-3.05,0.975) 5(-3.05,0.325) 6(-3.05,-0.325) 7(-3.05,-0.975) 8(-3.05,-1.625) 9(-3.05,-2.275) 10(-3.05,-2.925) 11(3.05,-2.925) 12(3.05,-2.275) 13(3.05,-1.625) 14(3.05,-0.975) 15(3.05,-0.325) 16(3.05,0.325) 17(3.05,0.975) 18(3.05,1.625) 19(3.05,2.275) 20(3.05,2.925)
  silkscreen extent -3.17,-3.3 1.85,3.82, body extent -3.21,-3.25 3.21,3.25, height 1
QFN50P700X700X100_HS-49N [mm] "QFN, 48-Leads, Body 7.00x7.00mm, Pitch 0.50mm, Thermal Pad 5.15x5.15mm, IPC Medium Density"
  oval 0.7x0.25 smd: 1(-3.375,2.75) 2(-3.375,2.25) 3(-3.375,1.75) 4(-3.375,1.25) 5(-3.375,0.75) 6(-3.375,0.25) 7(-3.375,-0.25) 8(-3.375,-0.75) 9(-3.375,-1.25) 10(-3.375,-1.75) 11(-3.375,-2.25) 12(-3.375,-2.75) 25(3.375,-2.75) 26(3.375,-2.25) 27(3.375,-1.75) 28(3.375,-1.25) 29(3.375,-0.75) 30(3.375,-0.25) 31(3.375,0.25) 32(3.375,0.75) 33(3.375,1.25) 34(3.375,1.75) 35(3.375,2.25) 36(3.375,2.75)
  oval 0.25x0.7 smd: 13(-2.75,-3.375) 14(-2.25,-3.375) 15(-1.75,-3.375) 16(-1.25,-3.375) 17(-0.75,-3.375) 18(-0.25,-3.375) 19(0.25,-3.375) 20(0.75,-3.375) 21(1.25,-3.375) 22(1.75,-3.375) 23(2.25,-3.375) 24(2.75,-3.375) 37(2.75,3.375) 38(2.25,3.375) 39(1.75,3.375) 40(1.25,3.375) 41(0.75,3.375) 42(0.25,3.375) 43(-0.25,3.375) 44(-0.75,3.375) 45(-1.25,3.375) 46(-1.75,3.375) 47(-2.25,3.375) 48(-2.75,3.375)
  rect 5.15x5.15 smd: 49(0,0)
  silkscreen extent -4.47,-3.7 3.7,3.7, body extent -3.55,-3.55 3.55,3.55, height 1
RESC1608X50X30NL20T20 [mm] "Chip Resistor, 2-Leads, Body 1.60x0.80mm, IPC Medium Density"
  rect 0.9x1 smd: 1(-0.65,0) 2(0.65,0)
  body extent -0.9,-0.5 0.9,0.5, height 0.5
RESC1608X55X25ML10T15 [mm] "Chip Resistor, 2-Leads, Body 1.60x0.80mm, IPC Low Density"
  rect 0.8x1 smd: 1(-0.75,0) 2(0.75,0)
  body extent -0.85,-0.45 0.85,0.45, height 0.55
RESC1608X55X30LL15T15 [mm] "Chip Resistor, 2-Leads, Body 1.60x0.80mm, IPC High Density"
  rect 0.7x0.85 smd: 1(-0.625,0) 2(0.625,0)
  body extent -0.87,-0.48 0.87,0.48, height 0.55
RESC1608X55X30LL20T10 [mm] "Chip Resistor, 2-Leads, Body 1.60x0.80mm, IPC High Density"
  rect 0.7x0.9 smd: 1(-0.65,0) 2(0.65,0)
  body extent -0.9,-0.5 0.9,0.5, height 0.55
RESC1608X55X30NL15T15 [mm] "Chip Resistor, 2-Leads, Body 1.60x0.80mm, IPC Medium Density"
  rect 0.8x0.95 smd: 1(-0.675,0) 2(0.675,0)
  body extent -0.87,-0.48 0.87,0.48, height 0.55
RESC1609X50X30ML10T20 [mm] "Chip Resistor, 2-Leads, Body 1.55x0.85mm, IPC Low Density"
  rect 0.9x1.05 smd: 1(-0.675,0) 2(0.675,0)
  body extent -0.82,-0.48 0.82,0.48, height 0.5
RESC1609X55X30LL15T15 [mm] "Chip Resistor, 2-Leads, Body 1.75x0.95mm, IPC High Density"
  rect 0.75x0.85 smd: 1(-0.65,0) 2(0.65,0)
  body extent -0.87,-0.48 0.87,0.48, height 0.55
RESC3116X65X40NL10T20 [mm] "Chip Resistor, 2-Leads, Body 3.10x1.60mm, IPC Medium Density"
  rect 1.05x1.7 smd: 1(-1.425,0) 2(1.425,0)
  silkscreen extent -0.5,-0.75 0.5,0.75, body extent -1.6,-0.85 1.6,0.85, height 0.65
SODFL350X120-2N [mm] "SODFL, 2-Leads, Body 1.60x3.50mm, IPC Medium Density"
  rect 0.9x0.75 smd: 1(-1.575,0) 2(1.575,0)
  silkscreen extent -1.97,-0.85 1.35,0.85, body extent -1.75,-0.85 1.75,0.85, height 1.2
SOT95P285X140-3N [mm] "SOT23, 3-Leads, Body 3.00x2.85mm, Pitch 0.95mm, IPC Medium Density"
  rect 1.05x0.6 smd: D(1.375,0) G(-1.375,0.95) S(-1.375,-0.95)
  silkscreen extent -1.5,-1.55 0.85,1.92, body extent -0.85,-1.55 0.85,1.55, height 1.4
SOT-23-CT5_N [mm] "SOT23, 5-Leads, Body 2.9x1.7mm, Pitch 0.95mm, Lead Span 2.8mm, IPC Medium Density"
  rect 1.1x0.65 smd: 1(-1.2,0.95) 2(-1.2,0) 3(-1.2,-0.95) 4(1.2,-0.95) 5(1.2,0.95)
  silkscreen extent -1.32,-1.55 0.25,1.95, body extent -0.9,-1.55 0.9,1.55, height 1.45
TDK-C5750-2_L [mm] "SMD, 2-Leads, Body 6.1x5.4mm, IPC High Density"
  rect 0.75x5.3 smd: 1(-2.825,0) 2(2.825,0)
  silkscreen extent -2.05,-2.55 2.05,2.55, body extent -3.05,-2.7 3.05,2.7, height 2.5
TECO-NANOSMDC150F-2_V [mm] "SMD, 2-Leads, Body 3.2x1.585mm"
  rect 1x1.6 smd: 1(-1.5,0) 2(1.5,0)
  silkscreen extent -0.6,-0.79 0.6,0.79, body extent -1.6,-0.79 1.6,0.79, height 0.89
"TI LuanchPad" [mil] "Fits ti LuanchPad"
  round 60 hole 40 mask+3: 1(-900,450) 2(-900,350) 3(-900,250) 4(-900,150) 5(-900,50) 6(-900,-50) 7(-900,-150) 8(-900,-250) 9(-900,-350) 10(-900,-450) 11(900,-450) 12(900,-350) 13(900,-250) 14(900,-150) 15(900,-50) 16(900,50) 17(900,150) 18(900,250) 19(900,350) 20(900,450) 21(-800,450) 22(-800,350) 23(-800,250) 24(-800,150) 25(-800,50) 26(-800,-50) 27(-800,-150) 28(-800,-250) 29(-800,-350) 30(-800,-450) 31(800,-450) 32(800,-350) 33(800,-250) 34(800,-150) 35(800,-50) 36(800,50) 37(800,150) 38(800,250) 39(800,350) 40(800,450)
  silkscreen extent -968,-530 968,530, body extent -951,-510 944,510, height 335
WE-HCI-1365 [mm] "Inductor, 2-Leads, Body 13.2 x 12.8 mm"
  rect 4.5x5 smd: 1(-5.25,0) 2(5.25,0)
  silkscreen extent -7.1,-6.65 7.1,6.65, body extent -7.1,-6.4 7.1,6.4, height 6.49
WSL27262L000FEB [mm] "Precision current sense resistor"
  rect 5.6x2.4 smd: 1(0,-2.58) 3(0,2.58)
  rect 0.89x2.4 smd: 2(4.135,-2.58) 4(4.135,2.58)
  silkscreen extent -3.18,-4.06 4.95,4.06, body extent -2.15,-3.45 4.45,3.45, height 2.68

## Part data
C1 C2 C3 C4 C5 C6 C9 C10 C11 C12 C21 C22 C23 C24 C31: library part CC0603JRX7R9BB104, "Cap Ceramic 0.1uF 50V X7R 5% SMD 0603 125C Paper T/R", Capacitance=100nF, Case/Package=0603, Case Code (Metric)=1608, Dielectric=X7R, Manufacturer=Yageo, Max Operating Temperature=125°C, Min Operating Temperature=-55°C, Tolerance=5%, Voltage Rating=50V, Case Code (Imperial)=0603, ComponentLink1Description=http://www.yageo.com/documents/recent/UPY-GPHC_X7R_6.3V-to-50V_8.pdf, ComponentLink1URL=http://www.yageo.com/documents/recent/UPY-GPHC_X7R_6.3V-to-50V_8.pdf, Composition=Ceramic, Depth=0.8mm, Halogen Free="Halogen Free", Height=0.8mm, Lead Free="Lead Free", Length=1.6mm, Manufacturer Part Number=CC0603JRX7R9BB104, Mount="Surface Mount", Number of Pins=2, Packaging="Tape and Reel", Pricing 1="1=0.17, 10=0.12, 100=0.0562, 500=0.03942, 1000=0.03263 (USD)", Radiation Hardening=No, Stock 1=40000, Supplier 1=Digi-Key, Termination=SMD/SMT, Thickness=0.035inch, Voltage Rating (DC)=50V, Weight=7.1E-05oz, Width=0.031inch
  C23: ClassName="3.3V Regulator"
  C24 C31: ClassName="5V Regulator"
C7: library part C0603C392J5RACTU, "Multilayer Ceramic Capacitors MLCC - SMD/SMT 50volts 3900pF X7R 5%", Case/Package=0603, Case Code (Metric)=1608, Dielectric=X7R, Dielectric Material=Ceramic, Manufacturer 1=KEMET, Max Operating Temperature=125°C, Min Operating Temperature=-55°C, Package Quantity=1, Tolerance=5%, Voltage Rating=50V, Capacitance=3.9nF, Case Code (Imperial)=0603, ComponentLink1Description=http://components.arrow.com/part/dataview/2089105S5980753N7429?src-supplier=Arrow, ComponentLink1URL=http://components.arrow.com/part/dataview/2089105S5980753N7429?src-supplier=Arrow, ComponentLink2Description=http://www.mouser.com/ds/2/212/KEM_C1002_X7R_SMD-1102033.pdf?src-supplier=Mouser, ComponentLink2URL=http://www.mouser.com/ds/2/212/KEM_C1002_X7R_SMD-1102033.pdf?src-supplier=Mouser, ComponentLink3Description=https://search.kemet.com/component-edge/download/datasheet/C0603C392J5RACTU.pdf?src-supplier=Digi-Key, ComponentLink3URL=https://search.kemet.com/component-edge/download/datasheet/C0603C392J5RACTU.pdf?src-supplier=Digi-Key, ComponentLink4Description=https://api.kemet.com/component-edge/download/datasheet/C0603C392J5RACTU.pdf?src-supplier=Digi-Key, ComponentLink4URL=https://api.kemet.com/component-edge/download/datasheet/C0603C392J5RACTU.pdf?src-supplier=Digi-Key, Depth=0.8mm, Dissipation Factor=2.5%, Height=0.8mm, Lead Pitch=0.7mm, Length=1.6mm, Manufacturer Part Number 1=C0603C392J5RACTU, Mount="Surface Mount", Packaging="Tape and Reel", Pricing 1="1=0.40000, 10=0.28100, 100=0.16840, 500=0.12628, 1000=0.10663 (USD)", REACH SVHC="No SVHC", RoHS=Yes, Stock 1=9639, Supplier 1=Digi-Key, Termination=SMD/SMT, Thickness=0.034inch, Voltage Rating (DC)=50V, Width=0.031inch
C8: library part 06035C393JAT2A, "Ceramic Capacitor 0.039uf 50v, X7r, 5%, 0603, Full Reel", Case/Package=0603, Case Code (Metric)=1608, Dielectric=X7R, Manufacturer 1="Kyocera AVX", Max Operating Temperature=125°C, Min Operating Temperature=-55°C, Package Quantity=4000, Tolerance=5%, Voltage Rating=50V, Capacitance=39nF, Case Code (Imperial)=0603, ComponentLink1Description=https://datasheet.ciiva.com/208/cx7r-208430.pdf?src-supplier=Digi-Key, ComponentLink1URL=https://datasheet.ciiva.com/208/cx7r-208430.pdf?src-supplier=Digi-Key, Depth=0.81mm, Dissipation Factor=2.5%, Length=1.6mm, Manufacturer Part Number 1=06035C393JAT2A, Mount="Surface Mount", Number of Pins=2, Packaging="Tape and Reel", Pricing 1="1=0.37000, 10=0.25900, 100=0.15560, 500=0.11670, 1000=0.09854 (USD)", Radiation Hardening=No, REACH SVHC=Unknown, RoHS=Yes, Stock 1=3075, Supplier 1=Digi-Key, Termination=SMD/SMT, Thickness=0.035inch, Voltage Rating (DC)=50V, Width=0.81mm
C13 C20: library part UMK107AB7105KA-T, "CAP CER 1UF 50V X7R 0603", Case/Package=0603, Case Code (Metric)=1608, Dielectric=X7R, Manufacturer="Taiyo Yuden", Manufacturer Part Number=GMK107AB7105MAHT, Max Operating Temperature=125°C, Min Operating Temperature=-55°C, Package Quantity=1, Tolerance=10%, Voltage Rating=50V, Capacitance=1uF, Case Code (Imperial)=0603, ComponentLink1Description=https://www.yuden.co.jp/productdata/catalog/mlcc_all_e.pdf, ComponentLink1URL=https://www.yuden.co.jp/productdata/catalog/mlcc_all_e.pdf, Depth=0.8mm, Halogen Free="Halogen Free", Height=0.8mm, Length=1.6mm, Mount="Surface Mount", Packaging="Tape and Reel", Pricing 1="1=0.29, 10=0.201, 100=0.1017, 500=0.0696, 1000=0.06158 (USD)", Pricing 2="1=0.29, 10=0.198, 100=0.1124, 500=0.07936, 1000=0.06943 (USD)", Radiation Hardening=No, Stock 1=1780, Stock 2=4000, Supplier 1=Digi-Key, Supplier 2=Digi-Key, Termination=SMD/SMT, Thickness=0.037inch, Voltage Rating (DC)=50V, Width=0.031inch
C14: library part CMP-1035-02516-1, "CAP 47nF 100V ±10% 0603 (1608 Metric) Thickness 1mm SMD", Case-EIA=0603, Case-Metric=1608, Rated Voltage="100 V", Tolerance=±10%, Max Thickness="1 mm", Technology=SMT
C15: library part CMP-2006-04476-1, Manufacturer="AVX Interconnect / Elco", Part Number=06036D106MAT2A
C16: library part CL10F104ZB8NNNC, "Cap Ceramic 0.1uF 50V Y5V -20% to 80% SMD 0603 85C T/R", Capacitance=100nF, Case/Package=0603, Case Code (Metric)=1608, Dielectric=Y5V, Manufacturer=Samsung, Max Operating Temperature=85°C, Min Operating Temperature=-30°C, Package Quantity=1, Tolerance=80%, Voltage=50V, Case Code (Imperial)=0603, ComponentLink1Description=http://www1.futureelectronics.com/doc/SAMSUNG/CL10F104ZB8NNNC.pdf, ComponentLink1URL=http://www1.futureelectronics.com/doc/SAMSUNG/CL10F104ZB8NNNC.pdf, ComponentLink2Description=https://www.verical.com/server-webapp/html/getDatasheet?partID=355329, ComponentLink2URL=https://www.verical.com/server-webapp/html/getDatasheet?partID=355329, ComponentLink3Description=https://www.distrelec.biz/Web/Downloads/_e/ng/MLCC_CatalogDownload2013_ENG.pdf?mime=application%2Fpdf, ComponentLink3URL=https://www.distrelec.biz/Web/Downloads/_e/ng/MLCC_CatalogDownload2013_ENG.pdf?mime=application%2Fpdf, ComponentLink4Description=https://produktinfo.conrad.com/datenblaetter/450000-474999/456692-da-01-en-VS_KONDENSATOR_0603.pdf, ComponentLink4URL=https://produktinfo.conrad.com/datenblaetter/450000-474999/456692-da-01-en-VS_KONDENSATOR_0603.pdf, Contact Plating=Tin, Depth=0.8mm, Height=0.8mm, Length=1.6mm, Manufacturer Part Number=CL10F104ZB8NNNC, Material=Ceramic, Mount="Surface Mount", Packaging="Tape and Reel", Pricing 1="1=0.1, 10=0.038, 100=0.0169, 500=0.01208, 1000=0.00949 (USD)", Radiation Hardening=No, Stock 1=40000, Supplier 1=Digi-Key, Thickness=0.035inch, Voltage Rating=50V, Width=0.031inch
C17 C18 C19: library part CMP-2000-07534-1, "Chip Capacitor, 10 uF, +/- 20%, 100 V, -55 to 125 degC, 2220 (5750 Metric), RoHS, Tape and Reel", Manufacturer=AVX, Package Description="2-Pin Surface Mount Device, Body 5 x 5.7 mm", Package Reference=2220, ClassName=FETBridge, Datasheet URL=http://datasheets.avx.com/X7RDielectric.pdf, Datasheet Version=03/2017, Manufacturer URL=http://www.avx.com/, Mounting Technology=SurfaceMount
C25: library part C2012X7R1V475K125AE, "CAP CER 4.7UF 35V X7R 0805", Case/Package=0805, Case Code (Metric)=2012, Dielectric=X7R, Manufacturer 1=TDK, Max Operating Temperature=125°C, Min Operating Temperature=-55°C, Package Quantity=2000, Tolerance=10%, Voltage Rating=35V, Capacitance=4.7uF, Case Code (Imperial)=0805, ClassName="3.3V Regulator", ComponentLink1Description=http://www.mouser.com/ds/2/400/tdk_mlcc_commercial_general_en-542463.pdf?src-supplier=Mouser, ComponentLink1URL=http://www.mouser.com/ds/2/400/tdk_mlcc_commercial_general_en-542463.pdf?src-supplier=Mouser, ComponentLink2Description=https://product.tdk.com/info/en/catalog/datasheets/mlcc_commercial_soft_en.pdf?src-supplier=Digi-Key, ComponentLink2URL=https://product.tdk.com/info/en/catalog/datasheets/mlcc_commercial_soft_en.pdf?src-supplier=Digi-Key, ComponentLink3Description=https://product.tdk.com/info/en/catalog/spec/mlccspec_commercial_soft_en.pdf?src-supplier=Digi-Key, ComponentLink3URL=https://product.tdk.com/info/en/catalog/spec/mlccspec_commercial_soft_en.pdf?src-supplier=Digi-Key, Features="Soft Termination", Height=1.25mm, Lead Free="Lead Free", Length=0.079inch, Manufacturer Part Number 1=C2012X7R1V475K125AE, Mount="Surface Mount", Packaging="Tape and Reel", Pricing 1="1=0.67000, 10=0.47200, 100=0.31050, 500=0.23000, 1000=0.19550 (USD)", RoHS=Yes, Stock 1=34290, Supplier 1=Digi-Key, Termination=SMD/SMT, Thickness=0.059inch, Voltage Rating (DC)=35V, Weight=0.000194oz, Width=1.2mm
C26: library part CL10A106MQ8NNNC, "Cap Ceramic 10uF 6.3V X5R 20% SMD 0603 85C Paper T/R", Case/Package=0603, Case Code (Metric)=1608, Dielectric=X5R, Manufacturer=Samsung, Max Operating Temperature=85°C, Min Operating Temperature=-55°C, Package Quantity=1, Tolerance=20%, Voltage=6.3V, Capacitance=10uF, Case Code (Imperial)=0603, ClassName="3.3V Regulator", ComponentLink1Description=http://www.samsungsem.com/kr/support/library/product-catalog/mlcc.jsp, ComponentLink1URL=http://www.samsungsem.com/kr/support/library/product-catalog/mlcc.jsp, ComponentLink2Description=https://www.verical.com/server-webapp/html/getDatasheet?partID=357557, ComponentLink2URL=https://www.verical.com/server-webapp/html/getDatasheet?partID=357557, ComponentLink3Description=http://www1.futureelectronics.com/doc/SAMSUNG%20PASSIVE/CL05B104KQ5NNNC.pdf, ComponentLink3URL=http://www1.futureelectronics.com/doc/SAMSUNG%20PASSIVE/CL05B104KQ5NNNC.pdf, Contact Plating=Tin, Depth=0.8mm, Height=0.8mm, Length=1.6mm, Manufacturer Part Number=CL10A106MQ8NNNC, Mount="Surface Mount", Packaging="Tape and Reel", Pricing 1="1=0.15, 10=0.11, 100=0.0515, 500=0.03614, 1000=0.02992 (USD)", Radiation Hardening=No, Stock 1=40000, Supplier 1=Digi-Key, Thickness=0.035inch, Voltage Rating=6.3V, Width=0.031inch